# Altium PCB 2.4寸LCD-CL24CR492-37B.PcbDoc
Units mm, origin at the board's own origin, x right, y up, seen from the top; angles counter-clockwise.
Board outline 42 x 93.5 mm, 2 copper layers (Top Layer, Bottom Layer), stack 1.571 mm thick; 15 components, 44 nets, 124 pads, 153 vias.
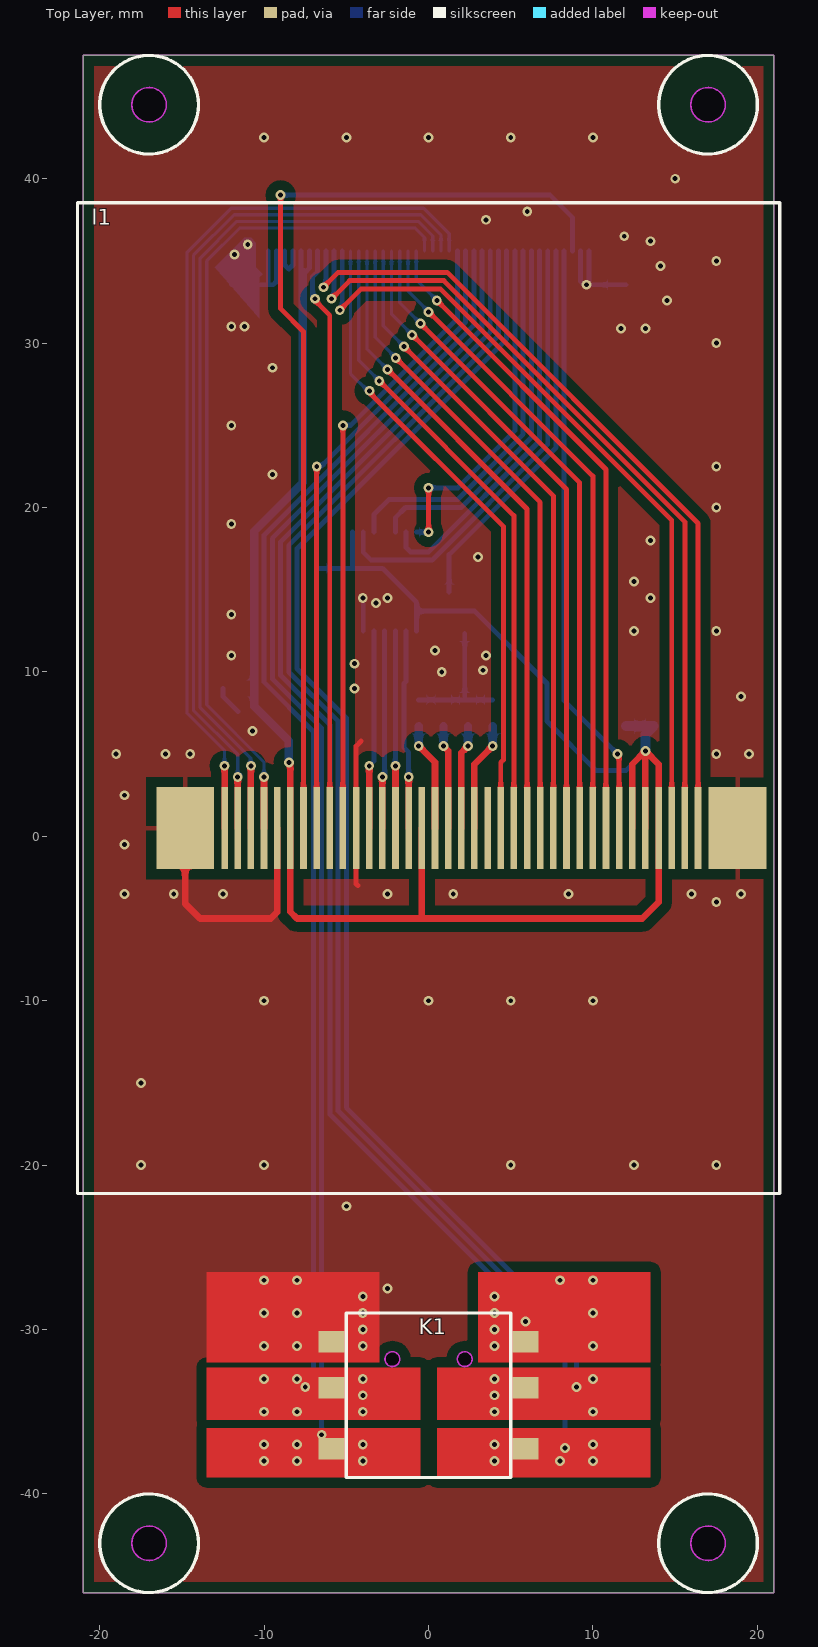
[diagram p0: Top Layer view]
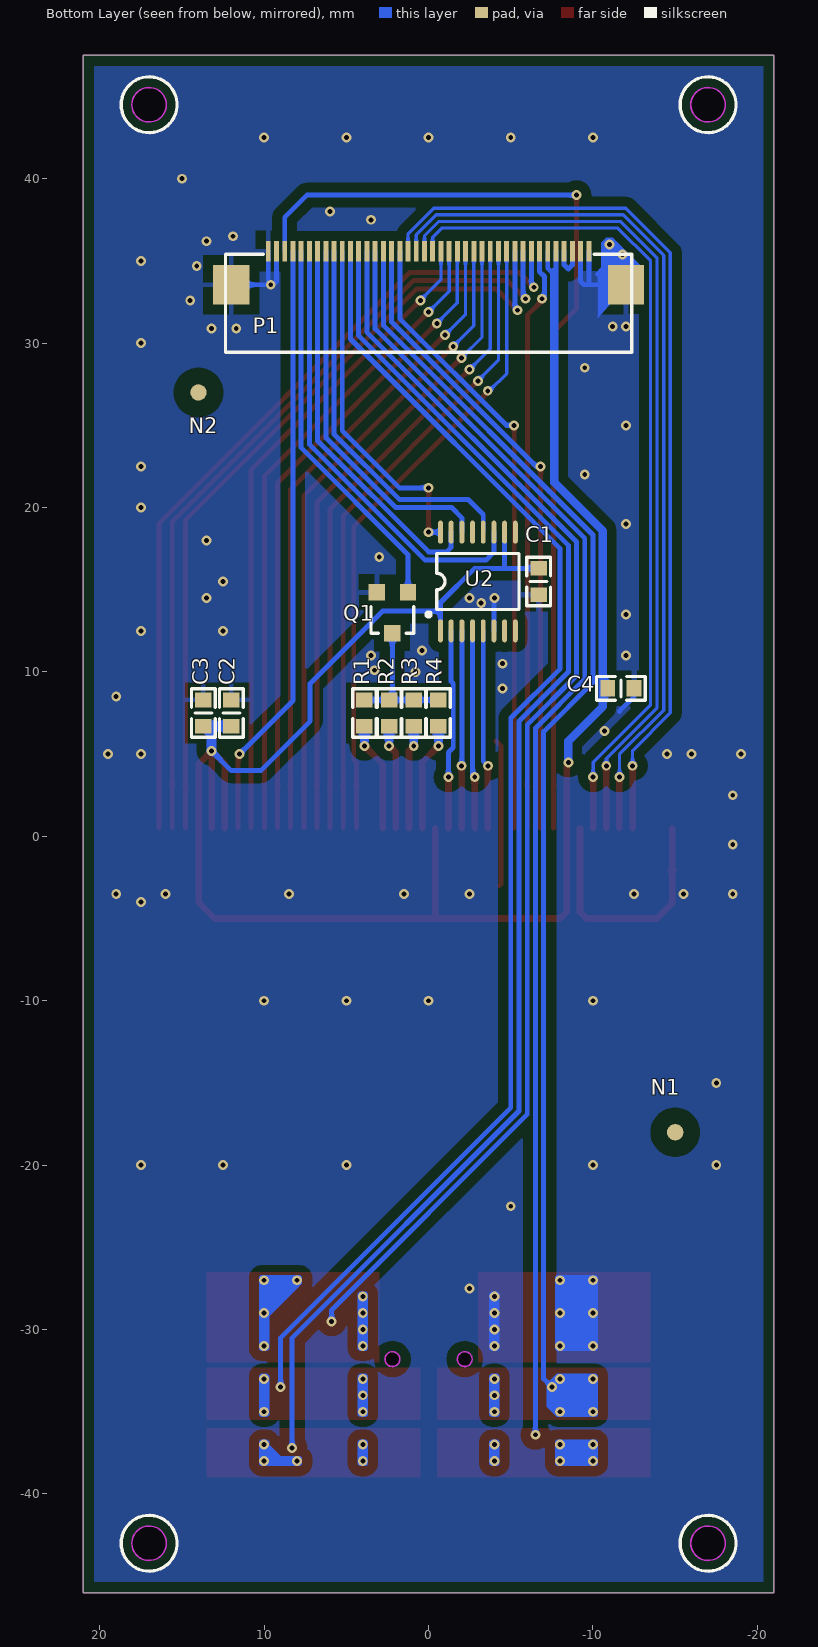
[diagram p1: Bottom Layer view, seen from below]
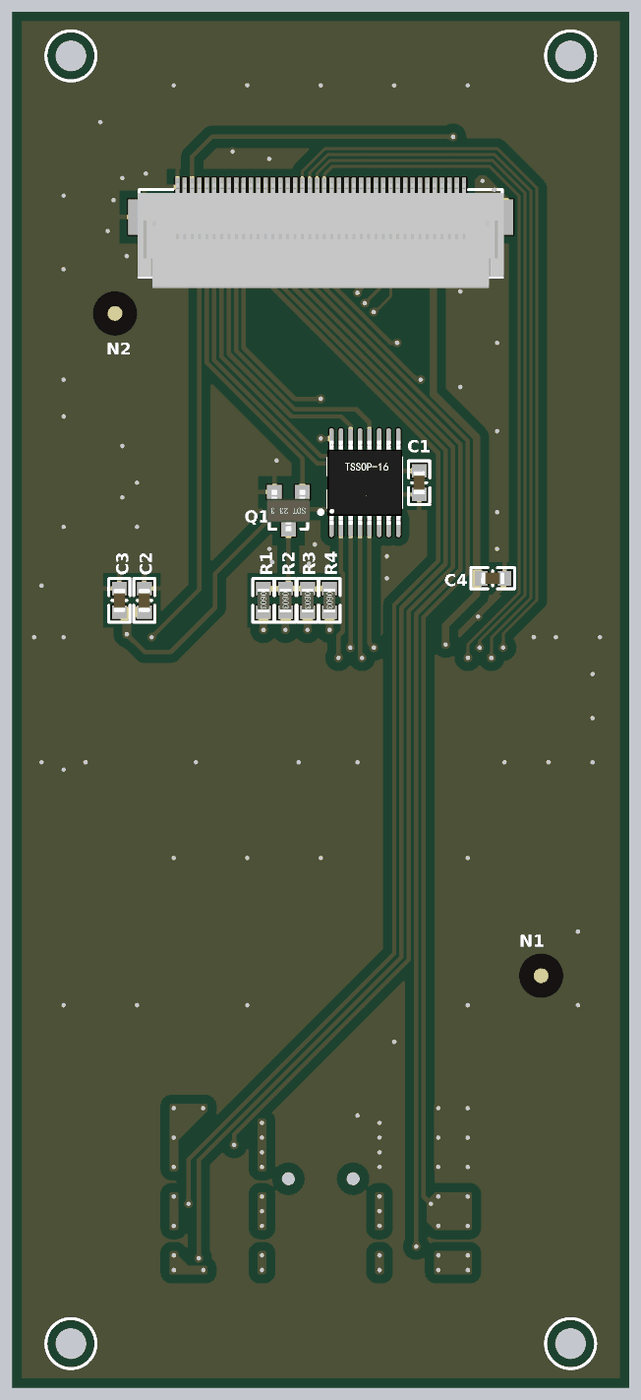
[diagram p2: 3D render of the assembled board from below, using the file's embedded part models]

## Layer stack, top to bottom
Top Solder: solder mask 0.0102, Solder Resist, Dk 3.5
Top Layer: signal copper 0.0356
Dielectric1: dielectric 1.5, FR-4, Dk 4.8
Bottom Layer: signal copper 0.0356
Bottom Solder: solder mask 0.0102, Solder Resist, Dk 3.5

## Board outline
-21,-46 21,-46 21,47.5 -21,47.5
cut-out: -17,45.55 ccw(c-17,44.5) -18.05,44.5 ccw(c-17,44.5) -17,43.45 ccw(c-17,44.5) -15.95,44.5 ccw(c-17,44.5)
cut-out: 17,45.55 ccw(c17,44.5) 15.95,44.5 ccw(c17,44.5) 17,43.45 ccw(c17,44.5) 18.05,44.5 ccw(c17,44.5)
cut-out: -17,-41.95 ccw(c-17,-43) -18.05,-43 ccw(c-17,-43) -17,-44.05 ccw(c-17,-43) -15.95,-43 ccw(c-17,-43)
cut-out: 17,-41.95 ccw(c17,-43) 15.95,-43 ccw(c17,-43) 17,-44.05 ccw(c17,-43) 18.05,-43 ccw(c17,-43)

## Design rules (kind name [scope] priority, off if disabled: settings)
Clearance Clearance敷铜间隔 [InPolygon] p1: gap=0.6
Clearance Clearance通用间隔 [All] p2: gap=0.2
PlaneConnect [All] p1: planeconnectstyle=Relief reliefexpansion=0.508 reliefentries=4 reliefconductorwidth=0.3 reliefairgap=0.3
PolygonConnect PolygonConnect_过孔 [All vs IsVia] p1: connectstyle=Direct reliefconductorwidth=0.254 reliefentries=4 polygonreliefangle="90 Angle" airgapwidth=0.254
PolygonConnect [All] p2: connectstyle=Relief reliefconductorwidth=0.3 reliefentries=4 polygonreliefangle="90 Angle" airgapwidth=0.6
RoutingVias [All] p1: holewidth=0.5 width=1 viastyle="Through Hole" minholewidth=0.4 minwidth=0.8 maxholewidth=10 maxwidth=10
SolderMaskExpansion [All] p1: expansion=0.102
Width [All] p1: maxlimit=10 minlimit=0.2 preferedwidth=0.5
29 further rules are at their usual default settings.

## Components (designator, comment, footprint, x,y, rotation, side; value= is the part's Value field where it differs from the comment)
C1 "104" C-0603 -6.7,15.5 r90 bottom
C2 "106" C-0603 12,7.5 r270 bottom
C3 "105" C-0603 13.7,7.5 r270 bottom
C4 "106" C-0603 -11.7,9 r0 bottom
K1 "TS-007" TS-007 0,-34 r0 top
l1 "CL24CR492-37B" CL24CR492-37B 0,11 r0 top locked
N1 "光学定位点" MARK-1mm-3mm -15,-18 r180 bottom
N2 "光学定位点" MARK-1mm-3mm 14,27 r180 bottom
P1 "" FPC-0.5mm_40P下接翻盖 0,34.5 r0 bottom locked
Q1 "2N7002" SOT-23 2.2,13.6 r90 bottom
R1 "10" R-0603 3.9,7.5 r270 bottom
R2 "10" R-0603 2.4,7.5 r270 bottom
R3 "10" R-0603 0.9,7.5 r270 bottom
R4 "10" R-0603 -0.6,7.5 r270 bottom
U2 "XPT2046" TSSOP-16 -3,15.5 r180 bottom

## Footprints (in the part's own frame and the unit in brackets; to place one, negate y for a bottom-side part, rotate by r counter-clockwise, add the part's x,y. Pads: shape width x height; smd on the part's side, far side on the other; paste and mask are expansions set on the pad)
C-0603 [mm]
  rect 0.9x1 smd: 1(-0.8,0) 2(0.8,0)
  silkscreen extent -1.48,-0.72 1.48,0.72, body extent -0.8,-0.4 0.8,0.4, height 0.6
CL24CR492-37B [mm]
  rect 0.4x5 smd: 1(-12.41,-10.5) 2(-11.61,-10.5) 3(-10.81,-10.5) 4(-10.01,-10.5) 5(-9.21,-10.5) 6(-8.41,-10.5) 7(-7.61,-10.5) 8(-6.81,-10.5) 9(-6.01,-10.5) 10(-5.21,-10.5) 11(-4.41,-10.5) 12(-3.61,-10.5) 13(-2.81,-10.5) 14(-2.01,-10.5) 15(-1.21,-10.5) 16(-0.41,-10.5) 17(0.39,-10.5) 18(1.19,-10.5) 19(1.99,-10.5) 20(2.79,-10.5) 21(3.59,-10.5) 22(4.39,-10.5) 23(5.19,-10.5) 24(5.99,-10.5) 25(6.79,-10.5) 26(7.59,-10.5) 27(8.39,-10.5) 28(9.19,-10.5) 29(9.99,-10.5) 30(10.79,-10.5) 31(11.59,-10.5) 32(12.39,-10.5) 33(13.19,-10.5) 34(13.99,-10.5) 35(14.79,-10.5) 36(15.59,-10.5) 37(16.39,-10.5)
  rect 3.5x5 smd: 38(18.79,-10.5) 39(-14.81,-10.5)
  silkscreen extent -21.36,-32.73 21.36,27.53, body extent -21.36,-32.73 21.36,27.53, height 2.25
FPC-0.5mm_40P下接翻盖 [mm]
  rect 0.3x1.25 smd: 1(-9.75,-1.1) 2(-9.25,-1.1) 3(-8.75,-1.1) 4(-8.25,-1.1) 5(-7.75,-1.1) 6(-7.25,-1.1) 7(-6.75,-1.1) 8(-6.25,-1.1) 9(-5.75,-1.1) 10(-5.25,-1.1) 11(-4.75,-1.1) 12(-4.25,-1.1) 13(-3.75,-1.1) 14(-3.25,-1.1) 15(-2.75,-1.1) 16(-2.25,-1.1) 17(-1.75,-1.1) 18(-1.25,-1.1) 19(-0.75,-1.1) 20(-0.25,-1.1) 21(0.25,-1.1) 22(0.75,-1.1) 23(1.25,-1.1) 24(1.75,-1.1) 25(2.25,-1.1) 26(2.75,-1.1) 27(3.25,-1.1) 28(3.75,-1.1) 29(4.25,-1.1) 30(4.75,-1.1) 31(5.25,-1.1) 32(5.75,-1.1) 33(6.25,-1.1) 34(6.75,-1.1) 35(7.25,-1.1) 36(7.75,-1.1) 37(8.25,-1.1) 38(8.75,-1.1) 39(9.25,-1.1) 40(9.75,-1.1)
  rect 2.2x2.4 smd: 41(12,0.95) 42(-12,0.95)
  silkscreen extent -12.35,-0.91 12.35,5.05, body extent -12.45,-1.4 12.45,5.8, height 2.5
MARK-1mm-3mm [mm]
  round 1 smd paste-0.6 mask+1: 1(0,0)
  Top Layer pour cut-out: -1.5,0 -1.386,-0.574 -1.061,-1.061 -0.574,-1.386 0,-1.5 0,-1.5 0.574,-1.386 1.061,-1.061 1.386,-0.574 1.5,0 1.5,0 1.386,0.574 1.061,1.061 0.574,1.386 0,1.5 0,1.5 -0.574,1.386 -1.061,1.061 -1.386,0.574 -1.5,0
R-0603 [mm]
  rect 0.9x1 smd: 1(-0.8,0) 2(0.8,0)
  silkscreen extent -1.48,-0.72 1.48,0.72, body extent -0.8,-0.4 0.8,0.4, height 0.45
SOT-23 [mm]
  rect 1x1 smd: 1(1.25,-0.95) 2(1.25,0.95) 3(-1.25,0)
  silkscreen extent -1.25,-1.3 0.38,1.3, body extent -1.4,-1.45 1.4,1.45, height 1.2
TS-007 [mm]
  rect 1.6x1.3 smd: 1(-5.9,3.25) 2(-5.9,0.45) 3(-5.9,-3.25) 4(5.9,-3.25) 5(5.9,0.45) 6(5.9,3.25)
  Keep-Out Layer circle w0.1: c-2.2,2.2 r0.45
  Keep-Out Layer circle w0.1: c2.2,2.2 r0.45
  Keep-Out Layer board cut-out: -2.2,1.75 -2.372,1.784 -2.518,1.882 -2.616,2.028 -2.65,2.2 -2.65,2.2 -2.616,2.372 -2.518,2.518 -2.372,2.616 -2.2,2.65 -2.2,2.65 -2.028,2.616 -1.882,2.518 -1.784,2.372 -1.75,2.2 -1.75,2.2 -1.784,2.028 -1.882,1.882 -2.028,1.784 -2.2,1.75
  Keep-Out Layer board cut-out: 2.2,1.75 2.028,1.784 1.882,1.882 1.784,2.028 1.75,2.2 1.75,2.2 1.784,2.372 1.882,2.518 2.028,2.616 2.2,2.65 2.2,2.65 2.372,2.616 2.518,2.518 2.616,2.372 2.65,2.2 2.65,2.2 2.616,2.028 2.518,1.882 2.372,1.784 2.2,1.75
  silkscreen extent -5,-5 5,5
TSSOP-16 [mm]
  oval 0.3x1.4 smd: 1(-2.275,-3) 2(-1.625,-3) 3(-0.975,-3) 4(-0.325,-3) 5(0.325,-3) 6(0.975,-3) 7(1.625,-3) 8(2.275,-3) 9(2.275,3) 10(1.625,3) 11(0.975,3) 12(0.325,3) 13(-0.325,3) 14(-0.975,3) 15(-1.625,3) 16(-2.275,3)
  silkscreen extent -3.13,-2.12 2.5,1.7, body extent -2.55,-2.85 2.55,2.85, height 1.45

## Part data
C1 C2 C3 C4: library part Cap-0603, "0805"
K1: "五向开关"
N1 N2: library part 无引脚
P1: library part MHDR1X42
R1 R2 R3 R4: library part Res2-0603, "0603"

## Via types
v1: diameter 0.6, hole 0.3, Top Layer to Bottom Layer, tented both sides, 153 vias

## Nets (pads, with @x,y where several pads share a name; then routed paths per layer and width w, separated by ;. In a path a pad name is that pad's centre, name@x,y a point inside that pad or via, vN(x,y) a via of type N, cw(c..) or ccw(c..) an arc to the next point about the centre after c; other vN are vias at no path point)
3.3V: C1.2 C2.2 C3.2 C4.2 l1.6 l1.16 l1.32 l1.33 l1.34 P1.5 P1.6 U2.1 U2.10 | length 125.2
  Top Layer w0.4: v1@-8.41,4.41 l1.6 -8.41,-4.59 -8,-5 13,-5 13.99,-4.01 l1.34 13.99,4.39 v1@13.19,5.19 ; -0.41,-4.89 l1.16 ; l1.32 12.39,4.39 v1@13.19,5.19 ; l1.33 v1@13.19,5.19
  Bottom Layer w0.3: -7.75,34.457 P1.5 ; -7.65,34.357 -7.55,34.257 -7.25,34.557 P1.6 ; C1.2 -2.8,16.3 -0.725,14.225 -0.725,13.7 ; -4.625,16.375 U2.10 ; U2.1 -0.725,13.7 ; v1(13.2,5.2) 12,4 10.2,4 7.2,7 7.2,9.3 2.8,13.7 -0.725,13.7
  Bottom Layer w0.5: v1(-8.5,4.5) -8.5,5.8 -10.6,7.9 -10.6,18.577 -7.65,21.527 -7.65,34.357
  Bottom Layer w0.6: C2.2 C3.2 13.2,6.2 v1(13.2,5.2)
5V: P1.3 P1.4 | length 2.4
  Bottom Layer w0.3: P1.3 -8.75,34.75 -8.5,34.5 -8.25,34.75 P1.4
CS: l1.7 P1.38 | length 59.4
  Top Layer w0.3: v1(-9,39) -9,32.09 -7.61,30.7 l1.7
  Bottom Layer w0.3: v1(-9,39) 7.4,39 8.75,37.65 P1.38
FSMC-A6: l1.8 P1.25 | length 39
  Top Layer w0.3: l1.8 -6.81,22.49 v1(-6.8,22.5)
  Bottom Layer w0.3: v1(-6.8,22.5) -6.536,22.5 2.25,31.286 P1.25
FSMC-D0: l1.1 P1.23 | length 54.7
  Top Layer w0.4: l1.1 v1(-12.41,4.29)
  Bottom Layer w0.2: v1(-12.41,4.29) -12.41,5.213 -14.7,7.503 -14.7,35.497 -11.997,38.2 -0.303,38.2 1.25,36.647 P1.23
FSMC-D1: l1.2 P1.22 | length 53.7
  Top Layer w0.4: l1.2 v1(-11.61,3.6)
  Bottom Layer w0.2: v1(-11.61,3.6) -11.61,4.979 -14.3,7.669 -14.3,35.331 -11.831,37.8 -0.469,37.8 0.75,36.581 P1.22
  Bottom Layer w0.3: v1(-11.61,3.6) v1@-11.475,3.735
FSMC-D2: l1.3 P1.21 | length 52.3
  Top Layer w0.4: l1.3 v1(-10.81,4.29)
  Bottom Layer w0.2: v1@-10.825,4.305 -10.825,4.759 -13.9,7.834 -13.9,35.166 -11.666,37.4 -0.634,37.4 0.25,36.516 P1.21
  Bottom Layer w0.3: v1@-10.825,4.305 v1(-10.81,4.29)
FSMC-D3: l1.4 P1.20 | length 51.1
  Top Layer w0.4: l1.4 v1(-10.01,3.6)
  Bottom Layer w0.2: v1(-10.01,3.6) -10.01,4.51 -13.5,8 -13.5,35 -11.5,37 -0.8,37 -0.25,36.45 P1.20
FSMC-D4: l1.22 P1.11 | length 39.1
  Top Layer w0.3: v1(-3.6,27.1) -3.6,27 4.55,18.85 4.55,4.65 4.39,4.49 l1.22
  Bottom Layer w0.2: P1.11 -4.75,28.15 -3.7,27.1 v1(-3.6,27.1)
FSMC-D5: l1.35 P1.10 | length 48.9
  Top Layer w0.3: v1(-5.4,32) -4.1,33.3 0.719,33.3 14.79,19.229 l1.35
  Bottom Layer w0.3: v1@-5.3,32 -5.25,32.05 P1.10
FSMC-D6: l1.36 P1.9 | length 49.3
  Top Layer w0.3: v1(-5.9,32.7) -4.8,33.8 0.926,33.8 15.59,19.136 l1.36
  Bottom Layer w0.3: v1@-5.75,32.95 P1.9
FSMC-D7: l1.37 P1.8 | length 50.2
  Top Layer w0.3: v1(-6.4,33.4) -5.5,34.3 1.133,34.3 16.39,19.043 l1.37
  Bottom Layer w0.3: v1@-6.4,33.5 -6.25,33.65 P1.8
FSMC-D8: l1.23 P1.12 | length 39
  Top Layer w0.3: v1(-3,27.7) 5.19,19.51 l1.23
  Bottom Layer w0.2: P1.12 -4.25,28.95 v1(-3,27.7)
FSMC-D9: l1.24 P1.13 | length 39.1
  Top Layer w0.3: v1(-2.5,28.4) 5.99,19.91 l1.24
  Bottom Layer w0.2: P1.13 -3.75,29.65 v1(-2.5,28.4)
FSMC-D10: l1.25 P1.14 | length 39.3
  Top Layer w0.3: v1(-2,29.1) 6.79,20.31 l1.25
  Bottom Layer w0.2: P1.14 -3.25,30.35 v1(-2,29.1)
FSMC-D11: l1.26 P1.15 | length 39.4
  Top Layer w0.3: v1(-1.5,29.8) 7.59,20.71 l1.26
  Bottom Layer w0.2: P1.15 -2.75,31.05 v1(-1.5,29.8)
FSMC-D12: l1.27 P1.16 | length 39.5
  Top Layer w0.3: v1(-1,30.5) 8.39,21.11 l1.27
  Bottom Layer w0.2: P1.16 -2.25,31.75 v1(-1,30.5)
FSMC-D13: l1.28 P1.17 | length 39.6
  Top Layer w0.3: v1(-0.5,31.2) 9.19,21.51 l1.28
  Bottom Layer w0.2: P1.17 -1.75,32.45 v1(-0.5,31.2)
FSMC-D14: l1.29 P1.18 | length 39.8
  Top Layer w0.3: v1(0,31.9) 9.99,21.91 l1.29
  Bottom Layer w0.2: P1.18 -1.25,33.15 v1(0,31.9)
FSMC-D15: l1.30 P1.19 | length 39.9
  Top Layer w0.3: v1(0.5,32.6) 10.79,22.31 l1.30
  Bottom Layer w0.2: P1.19 -0.75,33.85 v1(0.5,32.6)
FSMC-NOE: l1.10 P1.24 | length 38.2
  Top Layer w0.3: l1.10 v1@-5.21,25
  Bottom Layer w0.3: v1(-5.2,25) -4.743,25 1.75,31.493 P1.24
FSMC-NWE: l1.9 P1.7 | length 35.7
  Top Layer w0.3: v1(-6.9,32.7) -6.9,32.581 -6.01,31.691 l1.9
  Bottom Layer w0.3: v1(-6.9,32.7) -7.05,32.85 -7.05,34.05 -6.75,34.35 P1.7
GND: C1.1 C2.1 C3.1 C4.1 K1.1 l1.5 l1.11 l1.38 l1.39 P1.1 P1.2 P1.39 P1.40 P1.41 P1.42 Q1.2 U2.6 | length 41.6
  Top Layer w0.3: -4.3,-3 -4.41,-2.89 l1.11 -4.41,5.49 -4.1,5.8
  Top Layer w0.4: l1.39 -14.81,-4.09 -13.9,-5 -9.6,-5 -9.21,-4.61 l1.5
  Bottom Layer w0.3: C4.1 -12.5,8.5 -11.6,7.6 ; P1.42 -9.45,33.55 -9.25,33.75 P1.2 ; -9.75,33.6 P1.1 ; U2.6 -3.975,14.125 ; P1.39 9.25,33.75 9.45,33.55 P1.41 ; v1@9.75,33.6 P1.40
  other v1: -10,-31 -8,-31 -4,-31 -4,-30 -10,-29 -8,-29 -4,-29 -4,-28 -2.5,-27.5 -10,-27 -8,-27 -5,-22.5 -17.5,-20 -10,-20 5,-20 12.5,-20 17.5,-20 -17.5,-15 -10,-10 0,-10 5,-10 10,-10 17.5,-4 -18.5,-3.5 -15.5,-3.5 -12.5,-3.5 -2.5,-3.5 1.5,-3.5 8.5,-3.5 16,-3.5 19,-3.5 -18.5,-0.5 -18.5,2.5 -19,5 -16,5 -14.5,5 17.5,5 19.5,5 -10.7,6.4 19,8.5 -4.5,9 0.8,10 3.3,10.1 -4.5,10.5 -12,11 3.5,11 0.4,11.3 12.5,12.5 17.5,12.5 -12,13.5 -3.2,14.2 -4,14.5 -2.5,14.5 13.5,14.5 12.5,15.5 3,17 13.5,18 -12,19 17.5,20 -9.5,22 17.5,22.5 -12,25 -9.5,28.5 17.5,30 11.7,30.9 13.2,30.9 -12,31 -11.2,31 14.5,32.6 9.6,33.55 14.1,34.7 17.5,35 -11.8,35.4 -11,36 13.5,36.2 11.9,36.5 3.5,37.5 6,38 15,40 -10,42.5 -5,42.5 0,42.5 5,42.5 10,42.5
MISO: P1.32 U2.12 | length 23.3
  Bottom Layer w0.3: U2.12 -3.325,19.575 -2.4,20.5 1.786,20.5 5.75,24.464 5.75,27.9 P1.32
MOSI: P1.33 U2.14 | length 22.5
  Bottom Layer w0.3: U2.14 -2.025,19.375 -1.4,20 1.993,20 6.25,24.257 P1.33
Netl1_17: l1.17 R4.2 | length 6.6
  Top Layer w0.4: v1(-0.6,5.5) 0.39,4.51 l1.17
  Bottom Layer w0.5: v1(-0.6,5.5) R4.2
Netl1_18: l1.18 R3.2 | length 6.3
  Top Layer w0.4: v1(0.9,5.5) 1.19,5.21 l1.18
  Bottom Layer w0.5: v1(0.9,5.5) R3.2
Netl1_19: l1.19 R2.2 | length 6.4
  Top Layer w0.4: l1.19 1.99,5.09 v1(2.4,5.5)
  Bottom Layer w0.5: v1(2.4,5.5) R2.2
Netl1_20: l1.20 R1.2 | length 6.7
  Top Layer w0.4: l1.20 2.79,4.39 v1(3.9,5.5)
  Bottom Layer w0.5: v1(3.9,5.5) R1.2
NetQ1_3: Q1.3 R1.1 R2.1 R3.1 R4.1 | length 8.4
  Bottom Layer w0.3: R4.1 R3.1 R2.1 R1.1 ; R2.1@2.2,8.5 Q1.3
RST: l1.31 P1.37 | length 36.4
  Top Layer w0.3: l1.31 v1@11.59,4.91
  Bottom Layer w0.3: P1.37 8.25,8.25 v1(11.5,5)
SCK: P1.31 U2.16 | length 21
  Top Layer w0.3: v1(0,18.5) v1(0,21.2)
  Bottom Layer w0.3: U2.16 v1(0,18.5) ; v1(0,21.2) 1.779,21.2 5.25,24.671 P1.31
XN: l1.14 U2.3 | length 12
  Top Layer w0.4: l1.14 v1(-2.01,4.29)
  Bottom Layer w0.3: U2.3 -2.025,4.305 v1(-2.01,4.29)
XP: l1.12 U2.5 | length 12.1
  Top Layer w0.4: l1.12 v1(-3.61,4.29)
  Bottom Layer w0.3: v1(-3.61,4.29) -3.325,4.575 U2.5
YN: l1.15 U2.2 | length 12.2
  Top Layer w0.4: l1.15 v1(-1.21,3.6)
  Bottom Layer w0.3: U2.2 -1.375,9.425 -1.5,9.3 -1.5,5.4 -1.21,5.11 v1(-1.21,3.6)
YP: l1.13 U2.4 | length 12.1
  Top Layer w0.4: l1.13 v1(-2.81,3.6)
  Bottom Layer w0.3: v1(-2.81,3.6) -2.675,3.735 U2.4
按键-上: K1.6 P1.28 | length 77.8
  Top Layer w0.6: K1.6 v1(5.9,-29.5)
  Bottom Layer w0.3: P1.28 3.75,30.664 -9,17.914 -9,9.786 -6,6.786 -6,-16.914 5.9,-28.814 v1(5.9,-29.5)
  other v1: 4,-31 10,-31 4,-30 4,-29 10,-29 4,-28 8,-27 10,-27
按键-下: K1.4 P1.29 | length 87.5
  Top Layer w0.6: K1.4 8.25,-37.25 v1(8.3,-37.2)
  Bottom Layer w0.3: P1.29 4.25,30.457 -8.5,17.707 -8.5,9.993 -5.5,6.993 -5.5,-16.707 8.3,-30.507 v1(8.3,-37.2)
  other v1: 4,-38 8,-38 10,-38 4,-37 10,-37
按键-中: K1.3 P1.27 | length 80
  Top Layer w0.6: v1(-6.5,-36.4) -6.5,-36.65 K1.3
  Bottom Layer w0.3: -6.5,-36 v1(-6.5,-36.4) -6.5,6.579 -9.5,9.579 -9.5,18.121 3.25,30.871 P1.27
  other v1: -10,-38 -8,-38 -4,-38 -10,-37 -8,-37 -4,-37
按键-右: K1.5 P1.30 | length 84.5
  Top Layer w0.6: K1.5 5.95,-33.5 v1(9,-33.5)
  Bottom Layer w0.3: P1.30 4.75,30.25 -8,17.5 -8,10.2 -5,7.2 -5,-16.5 9,-30.5 v1(9,-33.5)
  other v1: 4,-35 10,-35 4,-34 4,-33 10,-33
按键-左: K1.2 P1.26 | length 77.5
  Top Layer w0.6: v1(-7.5,-33.5) -5.95,-33.5 K1.2
  Bottom Layer w0.3: v1(-7.5,-33.5) -7,-33 -7,6.372 -10,9.372 -10,18.328 2.75,31.078 P1.26
  other v1: -10,-35 -8,-35 -4,-35 -4,-34 -10,-33 -8,-33 -4,-33
背光使能: P1.36 Q1.1 | length 23.4
  Bottom Layer w0.3: Q1.1 1.25,17.136 7.75,23.636 P1.36
触摸CS: P1.34 U2.15 | length 23.5
  Bottom Layer w0.3: U2.15 -1.375,17.575 -1.1,17.3 0,17.3 6.75,24.05 P1.34
触摸中断: P1.35 U2.11 | length 27.3
  Bottom Layer w0.3: U2.11 -3.975,17.282 -3.493,16.8 0.207,16.8 7.25,23.843 P1.35
pads on no net: l1.21 N1.1 N2.1 U2.7 U2.8 U2.9 U2.13

## Polygon pours and split planes (outlines as drawn)
GND on Bottom Layer "Bottom Layer-No Net" (solid, remove dead copper, pour order 0): -21,47.5 21,47.5 21,-46 -21,-46
GND on Top Layer "Bottom Layer-No Net" (solid, remove dead copper, pour order 2): -21,47.5 21,47.5 21,-46 -21,-46

## Keep-outs
Keep-Out Layer:
  circle w0.1: c-17,44.5 r1.05
  circle w0.1: c17,44.5 r1.05
  circle w0.1: c-17,-43 r1.05
  circle w0.1: c17,-43 r1.05
  lines w0.1: -21,-46 -21,47.5 21,47.5 21,-46 -21,-46

## Other copper
Top Layer:
  region net 按键-中: -0.5,-36 -13.5,-36 -13.5,-39 -0.5,-39
  region net 按键-左: -0.5,-32.3 -13.5,-32.3 -13.5,-35.5 -0.5,-35.5
  region net GND: -3,-26.5 -13.5,-26.5 -13.5,-32 -3,-32
  rectangle net 按键-上: 3,-32 13.5,-26.5
  rectangle net 按键-右: 0.5,-35.5 13.5,-32.3
  rectangle net 按键-下: 0.5,-39 13.5,-36
  pour cut-out: -18.7,44.5 ccw(c-17,44.5) -17,42.8 ccw(c-17,44.5) -15.3,44.5 ccw(c-17,44.5) -17,46.2 ccw(c-17,44.5)
  pour cut-out: -20,44.5 ccw(c-17,44.5) -17,41.5 ccw(c-17,44.5) -14,44.5 ccw(c-17,44.5) -17,47.5 ccw(c-17,44.5)
  pour cut-out: 15.3,44.5 ccw(c17,44.5) 17,42.8 ccw(c17,44.5) 18.7,44.5 ccw(c17,44.5) 17,46.2 ccw(c17,44.5)
  pour cut-out: 14,44.5 ccw(c17,44.5) 17,41.5 ccw(c17,44.5) 20,44.5 ccw(c17,44.5) 17,47.5 ccw(c17,44.5)
  pour cut-out: -18.7,-43 ccw(c-17,-43) -17,-44.7 ccw(c-17,-43) -15.3,-43 ccw(c-17,-43) -17,-41.3 ccw(c-17,-43)
  pour cut-out: -20,-43 ccw(c-17,-43) -17,-46 ccw(c-17,-43) -14,-43 ccw(c-17,-43) -17,-40 ccw(c-17,-43)
  pour cut-out: 15.3,-43 ccw(c17,-43) 17,-44.7 ccw(c17,-43) 18.7,-43 ccw(c17,-43) 17,-41.3 ccw(c17,-43)
  pour cut-out: 14,-43 ccw(c17,-43) 17,-46 ccw(c17,-43) 20,-43 ccw(c17,-43) 17,-40 ccw(c17,-43)
Bottom Layer:
  region net 按键-左: -7.8,-32.7 -7.2,-33.3 -7.2,-34.7 -7.8,-35.3 -8.4,-34.7 -9.7,-34.7 -9.7,-33.3
  region net GND: -7.7,-26.8 -7.8,-26.7 -10.2,-26.7 -10.3,-26.8 -10.3,-31.2 -10.2,-31.3 -7.8,-31.3 -7.7,-31.2
  region net GND: -4.2,-27.7 -4.3,-27.8 -4.3,-31.2 -4.2,-31.3 -3.8,-31.3 -3.7,-31.2 -3.7,-27.8 -3.8,-27.7
  region net 按键-左: -10.3,-35.2 -10.2,-35.3 -7.8,-35.3 -7.7,-35.2 -7.7,-34.8 -7.8,-34.7 -10.2,-34.7 -10.3,-34.8
  region net 按键-左: -10.3,-33.2 -10.2,-33.3 -7.8,-33.3 -7.7,-33.2 -7.7,-32.8 -7.8,-32.7 -10.2,-32.7 -10.3,-32.8
  region net 按键-左: -10.2,-32.7 -10.3,-32.8 -10.3,-35.2 -10.2,-35.3 -9.8,-35.3 -9.7,-35.2 -9.7,-32.8 -9.8,-32.7
  region net 按键-右: 3.8,-32.7 3.7,-32.8 3.7,-35.2 3.8,-35.3 4.2,-35.3 4.3,-35.2 4.3,-32.8 4.2,-32.7
  region net 按键-左: -4.2,-32.7 -4.3,-32.8 -4.3,-35.2 -4.2,-35.3 -3.8,-35.3 -3.7,-35.2 -3.7,-32.8 -3.8,-32.7
  region net 按键-上: 3.8,-27.7 3.7,-27.8 3.7,-31.2 3.8,-31.3 4.2,-31.3 4.3,-31.2 4.3,-27.8 4.2,-27.7
  region net 按键-上: 10.2,-31.3 10.3,-31.2 10.3,-26.8 10.2,-26.7 7.8,-26.7 7.7,-26.8 7.7,-27.2 9.7,-29.2 9.7,-31.2 9.8,-31.3
  region net 按键-右: 10.2,-35.3 10.3,-35.2 10.3,-32.8 10.2,-32.7 9.8,-32.7 9.7,-32.8 9.7,-35.2 9.8,-35.3
  region net 按键-下: 9.7,-37 9,-37.7 7.8,-37.7 7.7,-37.8 7.7,-38.2 7.8,-38.3 10.2,-38.3 10.3,-38.2 10.3,-36.8 10.2,-36.7 9.8,-36.7 9.7,-36.8
  region net 按键-中: -10.2,-36.7 -10.3,-36.8 -10.3,-38.2 -10.2,-38.3 -7.8,-38.3 -7.7,-38.2 -7.7,-36.8 -7.8,-36.7
  region net 按键-下: 3.8,-36.7 3.7,-36.8 3.7,-38.2 3.8,-38.3 4.2,-38.3 4.3,-38.2 4.3,-36.8 4.2,-36.7
  region net 按键-中: -4.2,-36.7 -4.3,-36.8 -4.3,-38.2 -4.2,-38.3 -3.8,-38.3 -3.7,-38.2 -3.7,-36.8 -3.8,-36.7
  region net GND: -13,34.6 -11.2,36.4 -10.8,36.4 -10.5,36.1 -10.5,34.6 -10.1,34.2 -10.3,34 -10.3,31.5

## Silkscreen, mask and mechanical layers (free items; w line width, h text height)
Top Overlay:
  circle w0.2: c-17,44.5 r3
  circle w0.2: c17,44.5 r3
  circle w0.2: c-17,-43 r3
  circle w0.2: c17,-43 r3
Bottom Overlay:
  circle w0.2: c-17,44.5 r1.7
  circle w0.2: c17,44.5 r1.7
  circle w0.2: c-17,-43 r1.7
  circle w0.2: c17,-43 r1.7
Mechanical 15:
  lines w0.1: -103,0 85,0 ; 0,-122 0,109
  lines w0.2: -45.9,-113.27 42.1,-113.27 ; -45.9,-107.27 42.1,-107.27 ; -45.9,-101.27 42.1,-101.27 ; -45.9,-95.27 42.1,-95.27 ; -45.9,-89.27 42.1,-89.27 ; -45.9,-83.27 42.1,-83.27 ; -45.9,-77.27 42.1,-77.27 ; -23.9,-119.27 -23.9,-71.27 -23.9,-65.27 ; -45.9,-71.27 -45.9,-65.27 42.1,-65.27 42.1,-71.27 ; -45.9,-71.27 42.1,-71.27 ; -45.9,-71.27 -45.9,-119.27 42.1,-119.27 42.1,-71.27
  text "公司" at -44.9,-70.27 h5
  text "杭州久天科技有限公司" at -20.9,-70.27 h5
  text "工程" at -44.9,-76.27 h5
  text "设计" at -44.9,-82.27 h5
  text "邵宁鹏" at -20.9,-82.27 h5
  text "日期" at -44.9,-88.27 h5
  text "板厚" at -44.9,-94.27 h5
  text "1.6mm" at -20.9,-94.27 h5
  text "阻焊油" at -44.9,-100.27 h5
  text "绿色" at -20.9,-100.27 h5
  text "丝印" at -44.9,-106.27 h5
  text "白色" at -20.9,-106.27 h5
  text "板材" at -44.9,-112.27 h5
  text "FR-4" at -20.9,-112.27 h5
  text "其他" at -44.9,-118.27 h5
  text "有铅喷锡，过孔盖油" at -20.9,-118.27 h5

## Dimensions
22.5,-46 to 22.5,47.5 on Mechanical 15
-21,-47.5 to 21,-47.5 on Mechanical 15

## Text inside footprints (layer, text, board x,y; h text height)
l1: Mechanical 15 "2.4 TFT  240*320" at -7.892,22.927 h2; Mechanical 15 "12 O'CLOCK" at -7.892,26.396 h2; Mechanical 15 "ViewingDirection:" at -7.892,29.865 h2